# Altium PCB LINE_SENSOR.PcbDoc
Units mm, origin at the board's own origin, x right, y up, seen from the top; angles counter-clockwise.
Board outline 222 x 38.12 mm, 2 copper layers (Top Layer, Bottom Layer); 80 components, 36 nets, 175 pads, 39 vias.
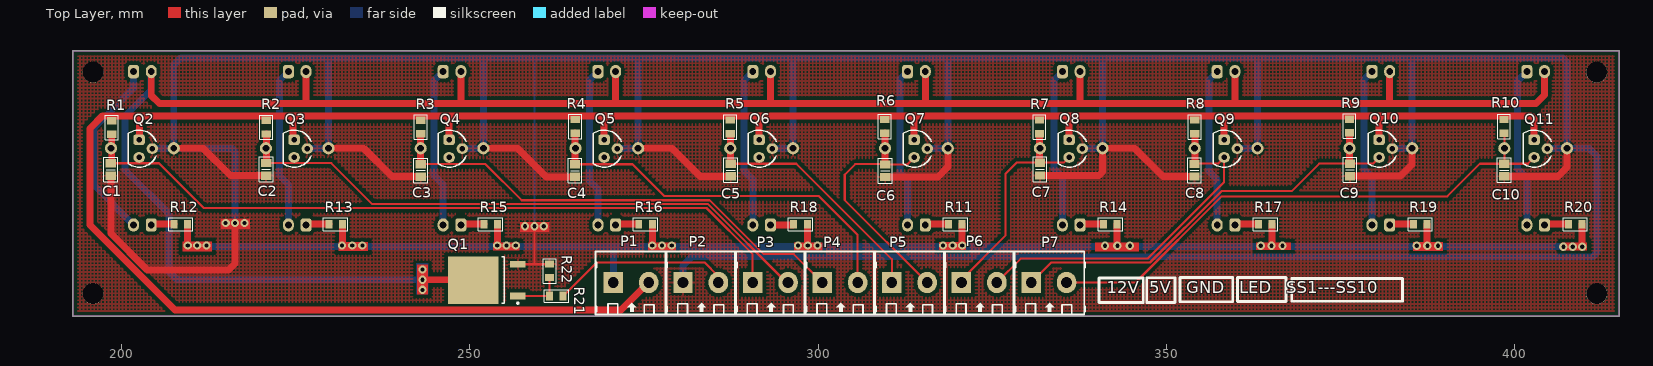
[diagram p0: Top Layer view]
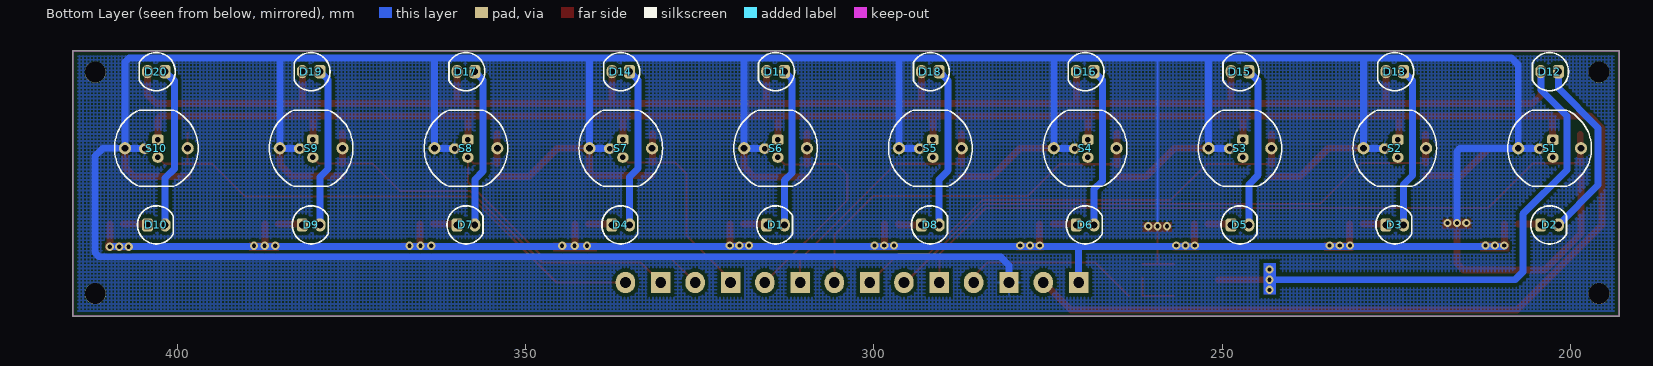
[diagram p1: Bottom Layer view, seen from below]
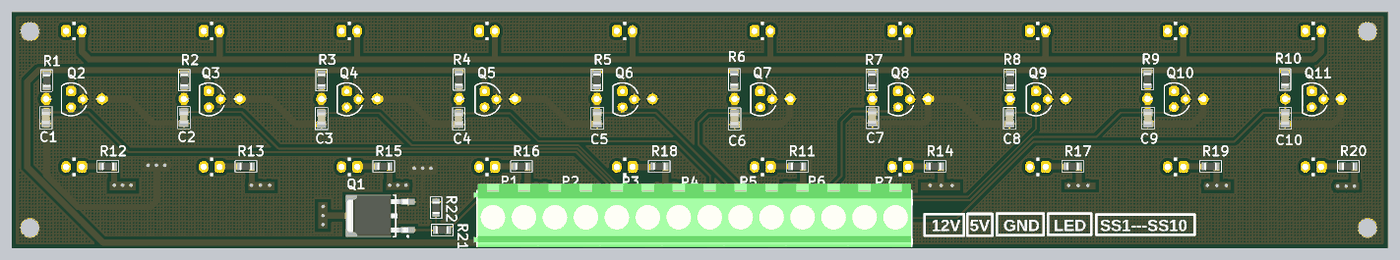
[diagram p2: 3D render of the assembled board from above, using the file's embedded part models]
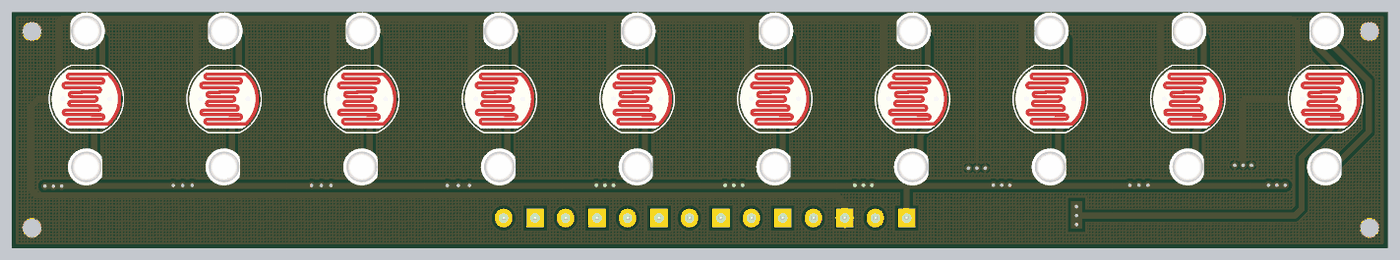
[diagram p3: 3D render of the assembled board from below, using the file's embedded part models]

## Layer stack, top to bottom
Top Solder: solder mask 0.0102, Solder Resist, Dk 3.5
Top Layer: signal copper 0.0356
Dielectric 1: dielectric 0.32, FR-4, Dk 4.8
Bottom Layer: signal copper 0.0356
Bottom Solder: solder mask 0.0102, Solder Resist, Dk 3.5

## Board outline
193,103.875 193,142 415,142 415,103.875

## Design rules (kind name [scope] priority, off if disabled: settings)
Clearance [All] p1: gap=0.254 except(0.508: Arc-Poly Track-Poly SMDPad-Poly THPad-Poly Via-Poly Fill-Poly Poly-Poly Poly-Region Poly-Text)
PolygonConnect [All] p1: connectstyle=Relief reliefconductorwidth=0.254 reliefentries=4 polygonreliefangle="90 Angle" airgapwidth=0.254
RoutingVias [All] p1: holewidth=0.711 width=1.27 viastyle="Through Hole" minholewidth=0.6 minwidth=1.2 maxholewidth=0.711 maxwidth=1.27
SolderMaskExpansion [All] p1: expansion=0.102
Width [All] p1: maxlimit=5 minlimit=0.254 preferedwidth=0.254
30 further rules are at their usual default settings.

## Components (designator, comment, footprint, x,y, rotation, side; value= is the part's Value field where it differs from the comment)
C1 "104" "C 0805" 198.475,124.95 r270 top
C2 "104" "C 0805" 220.75,124.975 r270 top
C3 "104" "C 0805" 242.95,124.825 r270 top
C4 "104" "C 0805" 265.1,124.8 r270 top
C5 "104" "C 0805" 287.45,124.875 r270 top
C6 "104" "C 0805" 309.625,124.775 r270 top
C7 "104" "C 0805" 331.85,125 r270 top
C8 "104" "C 0805" 354.025,124.85 r270 top
C9 "104" "C 0805" 376.35,124.9 r270 top
C10 "104" "C 0805" 398.5,124.875 r270 top
D1 "Led" "LED 5MM - WHITE" 314.111,117 r180 bottom locked
D2 "Led" "LED 5MM - WHITE" 203,117 r180 bottom locked
D3 "Led" "LED 5MM - WHITE" 225.222,117 r180 bottom locked
D4 "Led" "LED 5MM - WHITE" 336.333,117 r180 bottom locked
D5 "Led" "LED 5MM - WHITE" 247.444,117 r180 bottom locked
D6 "Led" "LED 5MM - WHITE" 269.667,117 r180 bottom locked
D7 "Led" "LED 5MM - WHITE" 358.556,117 r180 bottom locked
D8 "Led" "LED 5MM - WHITE" 291.889,117 r180 bottom locked
D9 "Led" "LED 5MM - WHITE" 380.778,117 r180 bottom locked
D10 "Led" "LED 5MM - WHITE" 403,117 r180 bottom locked
D11 "Led" "LED 5MM - WHITE" 314.111,139 r0 bottom locked
D12 "Led" "LED 5MM - WHITE" 203,139 r0 bottom locked
D13 "Led" "LED 5MM - WHITE" 225.222,139 r0 bottom locked
D14 "Led" "LED 5MM - WHITE" 336.333,139 r0 bottom locked
D15 "Led" "LED 5MM - WHITE" 247.444,139 r0 bottom locked
D16 "Led" "LED 5MM - WHITE" 269.667,139 r0 bottom locked
D17 "Led" "LED 5MM - WHITE" 358.556,139 r0 bottom locked
D18 "Led" "LED 5MM - WHITE" 291.889,139 r0 bottom locked
D19 "Led" "LED 5MM - WHITE" 380.778,139 r0 bottom locked
D20 "Led" "LED 5MM - WHITE" 403,139 r0 bottom locked
P1 "Header 2" "HDR Domino 2 - 5MM" 270.6,108.725 r0 top locked
P2 "Header 2" "HDR Domino 2 - 5MM" 280.6,108.725 r0 top locked
P3 "Header 2" "HDR Domino 2 - 5MM" 290.6,108.725 r0 top locked
P4 "Header 2" "HDR Domino 2 - 5MM" 300.594,108.725 r0 top locked
P5 "Header 2" "HDR Domino 2 - 5MM" 310.575,108.725 r0 top locked
P6 "Header 2" "HDR Domino 2 - 5MM" 320.575,108.725 r0 top locked
P7 "Header 2" "HDR Domino 2 - 5MM" 330.575,108.725 r0 top locked
Q1 "MOSFET N-Channel" "TO-252 (DPAK)" 252.45,109.075 r180 top
Q2 "Transistor PNP" TO-92/W100A 202.525,127.95 r270 top
Q3 "Transistor PNP" TO-92/W100A 224.775,127.95 r270 top
Q4 "Transistor PNP" TO-92/W100A 247.025,127.95 r270 top
Q5 "Transistor PNP" TO-92/W100A 269.275,127.95 r270 top
Q6 "Transistor PNP" TO-92/W100A 291.525,127.95 r270 top
Q7 "Transistor PNP" TO-92/W100A 313.775,127.95 r270 top
Q8 "Transistor PNP" TO-92/W100A 336.025,127.95 r270 top
Q9 "Transistor PNP" TO-92/W100A 358.275,127.95 r270 top
Q10 "Transistor PNP" TO-92/W100A 380.525,127.95 r270 top
Q11 "Transistor PNP" TO-92/W100A 402.775,127.95 r270 top
R1 "10k" "R 0805" 198.6,130.975 r90 top
R2 "10k" "R 0805" 220.8,131.025 r90 top
R3 "10k" "R 0805" 242.95,131.05 r90 top
R4 "10k" "R 0805" 265.125,131.15 r90 top
R5 "10k" "R 0805" 287.4,131.075 r90 top
R6 "10k" "R 0805" 309.575,131.15 r90 top
R7 "10k" "R 0805" 331.775,131.075 r90 top
R8 "10k" "R 0805" 354.075,131.075 r90 top
R9 "10k" "R 0805" 376.275,131.2 r90 top
R10 "10k" "R 0805" 398.45,131.15 r90 top
R11 "100" "R 0805 (2012)" 319.708,117.1 r0 top
R12 "100" "R 0805 (2012)" 208.5,117.1 r0 top
R13 "100" "R 0805 (2012)" 230.742,117.1 r0 top
R14 "100" "R 0805 (2012)" 341.95,117.1 r0 top
R15 "100" "R 0805 (2012)" 252.983,117.1 r0 top
R16 "100" "R 0805 (2012)" 275.225,117.1 r0 top
R17 "100" "R 0805 (2012)" 364.192,117.1 r0 top
R18 "100" "R 0805 (2012)" 297.467,117.1 r0 top
R19 "100" "R 0805 (2012)" 386.433,117.1 r0 top
R20 "100" "R 0805 (2012)" 408.675,117.1 r0 top
R21 "4k7" "R 0805 (2012)" 262.425,106.8 r0 top
R22 "100k" "R 0805 (2012)" 261.45,110.4 r270 top
S1 "Photoresistor" PHOTOCELL/12mm 203,128 r180 bottom locked
S2 "Photoresistor" PHOTOCELL/12mm 225.222,128 r180 bottom locked
S3 "Photoresistor" PHOTOCELL/12mm 247.444,128 r180 bottom locked
S4 "Photoresistor" PHOTOCELL/12mm 269.667,128 r180 bottom locked
S5 "Photoresistor" PHOTOCELL/12mm 291.889,128 r180 bottom locked
S6 "Photoresistor" PHOTOCELL/12mm 314.111,128 r180 bottom locked
S7 "Photoresistor" PHOTOCELL/12mm 336.333,128 r180 bottom locked
S8 "Photoresistor" PHOTOCELL/12mm 358.556,128 r180 bottom locked
S9 "Photoresistor" PHOTOCELL/12mm 380.778,128 r180 bottom locked
S10 "Photoresistor" PHOTOCELL/12mm 403,128 r180 bottom locked

## Footprints (in the part's own frame and the unit in brackets; to place one, negate y for a bottom-side part, rotate by r counter-clockwise, add the part's x,y. Pads: shape width x height; smd on the part's side, far side on the other; paste and mask are expansions set on the pad)
"C 0805" [mm] "Chip Capacitor, 2-Leads, Body 2.0x1.3mm, IPC Medium Density"
  rect 1.2x1.5 smd: 1(-0.9,0) 2(0.9,0)
  silkscreen extent -1.78,-1 1.78,1, body extent -1,-0.64 1,0.61, height 0.6
"HDR Domino 2 - 5MM" [mil] "Header 2, 2 pin, hight 400mil, Pin to Pin 200mil, Colour Green"
  rect 110x120 hole 60: 1(0,0)
  oval 110x120 hole 60: 2(200,0)
  silkscreen extent -100,-180 305,175, body extent -121,-186 296,219, height 559
"LED 5MM - WHITE" [mil]
  rrect50% 62x75 hole 39: 1(-50,0)
  oval 62x75 hole 39: 2(50,0)
  silkscreen extent -107,-108 96,108, body extent -118,-118 98,118, height 336
PHOTOCELL/12mm [mm] "Photoresistor"
  round 1.75 hole 1: 1(-4.5,0) 2(4.5,0)
  silkscreen extent -6,-5.46 6,5.46, body extent -5.62,-4.77 5.63,4.78, height 2.93
"R 0805" [mm] "Chip Resistor, 2-Leads, Body 2.0x1.3mm, IPC Medium Density"
  rect 1.05x1.35 smd: 1(-0.975,0) 2(0.975,0)
  silkscreen extent -1.75,-0.92 1.75,0.92, body extent -1,-0.61 1,0.59, height 0.5
"R 0805 (2012)" [mm] "Chip Resistor, 2-Leads, Body 2.0x1.3mm, IPC Medium Density"
  rect 1x1.25 smd: 1(-0.975,0) 2(0.975,0)
  silkscreen extent -1.75,-0.92 1.75,0.92, body extent -1,-0.61 1,0.59, height 0.5
TO-92/W100A [mil]
  rrect50% 60x65 hole 31: 1(-50,0)
  oval 60x65 hole 31: 2(0,75) 3(50,0)
  silkscreen extent -105,-60 105,97
"TO-252 (DPAK)" [mm] "D-PAK, 3-Pads, Body 6.2x6.7mm (max), IPC Medium Density"
  rect 2.25x0.95 smd: 1(-4.45,2.28) 3(-4.45,-2.28)
  rect 7.3x6.8 smd: 2(1.95,0)
  silkscreen extent -4.58,-3.35 -2.1,3.43, body extent -4.54,-3.27 5.4,3.27, height 2.41

## Part data
C1 C2 C3 C4 C5 C6 C7 C8 C9 C10: library part "Capacitor NP", "Capacitor non-pol"
D1 D2 D3 D4 D5 D6 D7 D8 D9 D10 D11 D12 D13 D14 D15 D16 D17 D18 D19 D20: "Typical LED"
P1 P2 P3 P4 P5 P6 P7: "Header, 2-Pin"
Q2 Q3 Q4 Q5 Q6 Q7 Q8 Q9 Q10 Q11: "PNP Bipolar Transistor"
R1 R2 R3 R4 R5 R6 R7 R8 R9 R10 R11 R12 R13 R14 R15 R16 R17 R18 R19 R20 R21 R22: library part Resistor, "Resistor"
S1 S2 S3 S4 S5 S6 S7 S8 S9 S10: "Light dependent resistors"

## Free pads (board coordinates)
  round 3 hole 3: 2(195.9,107.125) 3(195.9,138.925) 4(411.775,138.925) 5(411.775,107.125)

## Via types
v1: diameter 1.2, hole 0.6, Top Layer to Bottom Layer, tented both sides, 39 vias

## Nets (pads, with @x,y where several pads share a name; then routed paths per layer and width w, separated by ;. In a path a pad name is that pad's centre, name@x,y a point inside that pad or via, vN(x,y) a via of type N, cw(c..) or ccw(c..) an arc to the next point about the centre after c; other vN are vias at no path point)
5V: P1.2 Q2.1 Q3.1 Q4.1 Q5.1 Q6.1 Q7.1 Q8.1 Q9.1 Q10.1 Q11.1 R1.2 R2.2 R3.2 R4.2 R5.2 R6.2 R7.2 R8.2 R9.2 R10.2 | length 343.2
  Top Layer w1: Q2.1@202.575,129.245 202.575,132.589 202.5,132.664 ; Q3.1 224.65,129.345 224.65,132.664 ; 225.944,132.619 225.9,132.664 ; Q4.1 247.025,132.639 247,132.664 ; Q5.1 269.275,132.539 269.15,132.664 ; 270.405,132.658 270.4,132.664 ; P1.2 271.711,104.756 207.694,104.756 195.45,117 195.45,130.85 197.264,132.664 202.5,132.664 ; Q6.1 291.525,132.489 291.35,132.664 ; 292.636,132.653 292.625,132.664 ; Q7.1 313.775,132.514 ; Q8.1 336.025,132.638 336.05,132.664 ; Q9.1 358.275,132.614 358.225,132.664 ; Q10.1 380.525,132.639 380.5,132.664 ; Q11.1 402.775,132.25 402.361,132.664 380.5,132.664 ; 202.5,132.664 224.65,132.664 ; 224.65,132.664 225.9,132.664 ; 225.9,132.664 247,132.664 ; 247,132.664 269.15,132.664 ; 269.15,132.664 270.4,132.664 ; 270.4,132.664 291.35,132.664 ; 291.35,132.664 292.625,132.664 ; 292.625,132.664 336.05,132.664 ; 336.05,132.664 358.225,132.664 ; 358.225,132.664 380.5,132.664
12V: P1.1 R11.2 R12.2 R13.2 R14.2 R15.2 R16.2 R17.2 R18.2 R19.2 R20.2 | length 237.2
  Top Layer w1: R12.2 209.475,113.95 v1@209.5,113.925 ; v1@231.65,113.875 231.717,113.942 R13.2 ; v1@253.95,113.925 253.958,113.933 R15.2 ; v1@276.2,113.925 R16.2 ; R18.2 298.442,113.983 v1@298.45,113.975 ; v1@320.675,114.017 v1@320.683,114.025 ; v1@320.683,113.933 R11.2 ; v1@342.925,113.95 R14.2 ; v1@365.1,114 365.167,114.067 R17.2 ; v1@387.4,113.925 387.408,113.933 R19.2 ; R20.2 409.675,117.075 v1@409.675,113.925
  Bottom Layer w1: v1@209.5,113.925 253.95,113.925 270.5,113.925 ; P1.1 270.6,113.825 270.5,113.925 ; v1@409.675,113.925 387.4,113.925 276.2,113.925 270.5,113.925
  other v1: 406.975,113.875 408.325,113.875 409.675,113.875 341.175,114 342.962,114 344.75,114 363.525,114 365.087,114 366.65,114 385.925,114 387.45,114 388.975,114 209.5,114.035 210.85,114.035 212.2,114.035 231.65,114.035 233.112,114.035 234.575,114.035 253.95,114.035 255.275,114.035 256.6,114.035 276.2,114.035 277.587,114.035 278.975,114.035 297.1,114.035 298.5,114.035 299.9,114.035 317.925,114.035 319.3,114.035 320.675,114.035
GND: C1.2 C2.2 C3.2 C4.2 C5.2 C6.2 C7.2 C8.2 C9.2 C10.2 P2.1 pad.2 pad.3 pad.4 pad.5 Q1.3 Q2.2 Q3.2 Q4.2 Q5.2 Q6.2 Q7.2 Q8.2 Q9.2 Q10.2 Q11.2 R22.1 S1.1 S2.1 S3.1 S4.1 S5.1 S6.1 S7.1 S8.1 S9.1 S10.1 | length 723.2
  Top Layer w0.3: Q1.3 259.275,111.355 ; v1(259.275,116.8) 259.275,111.355 ; R22.1 261.43,111.355 259.275,111.355
  Top Layer w1: C1.2 198.475,115.748 203.698,110.525 215.35,110.525 216.3,111.475 v1(216.3,117.275) ; S1.1 211.725,128 215.65,124.075 C2.2 ; v1@214.925,117.19 v1@214.95,117.165 ; S2.1 234.775,128 238.85,123.925 C3.2 ; S3.1 256.875,128 260.975,123.9 C4.2 ; v1@257.9,116.715 v1@257.925,116.69 ; S4.1 279.05,128 283.075,123.975 C5.2 ; C6.2 317.2,123.875 318.611,125.286 S6.1 ; C7.2 340.325,124.1 340.833,124.608 S7.1 345.425,128 349.475,123.95 C8.2 ; C9.2 383.625,124 385.278,125.653 S9.1 ; C10.2 406.2,123.975 407.5,125.275 S10.1
  Bottom Layer w0.3: v1(259.275,116.8) 259.275,140.9 259.325,140.95
  Bottom Layer w1: Q2.2 S1.1@207.45,127.95 ; v1(216.3,117.275) 216.3,127.55 215.9,127.95 S1.1@207.45,127.95 ; Q3.2 229.672,127.95 S2.1 229.722,140.928 229.7,140.95 ; Q4.2 251.894,127.95 S3.1 251.944,140.856 251.85,140.95 ; Q5.2 274.117,127.95 S4.1 274.167,140.867 274.25,140.95 ; P2.1 280.6,111.2 281.825,112.425 411.2,112.425 411.8,113.025 411.8,126.875 410.675,128 S10.1 ; Q6.2 296.339,127.95 S5.1 296.389,140.939 296.4,140.95 ; Q7.2 318.561,127.95 S6.1 318.611,140.711 318.85,140.95 ; Q8.2 340.783,127.95 S7.1 340.833,140.908 340.875,140.95 ; Q9.2 363.006,127.95 S8.1 363.056,140.844 362.95,140.95 ; Q10.2 385.228,127.95 S9.1 385.278,140.878 385.35,140.95 ; Q11.2 407.45,127.95 S10.1 ; S1.1@207.45,127.95 S1.1 207.5,139.975 208.475,140.95 229.7,140.95 ; 229.7,140.95 251.85,140.95 ; 251.85,140.95 259.325,140.95 274.25,140.95 ; 274.25,140.95 296.4,140.95 ; 296.4,140.95 318.85,140.95 ; 318.85,140.95 340.875,140.95 ; 340.875,140.95 362.95,140.95 ; 362.95,140.95 385.35,140.95 ; 385.35,140.95 406.925,140.95 407.5,140.375 S10.1
  other v1: 257.925,116.8 260.625,116.8 214.95,117.275 217.65,117.275
"LED PWM": P2.2 R21.2 | length 26
  Top Layer w0.3: R21.2 268.2,111.6 283.725,111.6 285.68,109.645 P2.2
NetD1_1: D1.1 R11.1 | length 3.4
  Top Layer w1: D1.1 315.481,117.1 R11.1
NetD1_2: D1.2 D11.1 | length 22.9
  Bottom Layer w1: D1.2 312.841,123.409 311.775,124.475 311.775,137.934 D11.1
NetD2_1: D2.1 R12.1 | length 3.3
  Top Layer w1: D2.1 204.37,117.1 R12.1
NetD2_2: D2.2 D12.1 | length 26.7
  Bottom Layer w1: D2.2 196.025,122.705 196.025,130.925 201.73,136.63 D12.1
NetD3_1: D3.1 R13.1 | length 3.3
  Top Layer w1: D3.1 226.592,117.1 R13.1
NetD3_2: D3.2 D13.1 | length 23.1
  Bottom Layer w1: D3.2 223.952,122.798 222.65,124.1 222.65,137.698 D13.1
NetD4_1: D4.1 R14.1 | length 3.4
  Top Layer w1: D4.1 337.703,117.1 R14.1
NetD4_2: D4.2 D14.1 | length 23
  Bottom Layer w1: D4.2 335.063,123.862 333.85,125.075 333.85,137.787 D14.1
NetD5_1: D5.1 R15.1 | length 3.3
  Top Layer w1: D5.1 248.814,117.1 R15.1
NetD5_2: D5.2 D15.1 | length 23.1
  Bottom Layer w1: D5.2 246.174,122.801 244.825,124.15 244.825,137.651 D15.1
NetD6_1: D6.1 R16.1 | length 3.4
  Top Layer w1: D6.1 271.037,117.1 R16.1
NetD6_2: D6.2 D16.1 | length 23
  Bottom Layer w1: D6.2 268.397,122.128 267.2,123.325 267.2,137.803 D16.1
NetD7_1: D7.1 R17.1 | length 3.4
  Top Layer w1: D7.1 359.926,117.1 R17.1
NetD7_2: D7.2 D17.1 | length 23
  Bottom Layer w1: D7.2 357.286,123.514 356.1,124.7 356.1,137.814 D17.1
NetD8_1: D8.1 R18.1 | length 3.4
  Top Layer w1: D8.1 296.392,117 R18.1
NetD8_2: D8.2 D18.1 | length 23
  Bottom Layer w1: D8.2 290.619,123.531 289.375,124.775 289.375,137.756 D18.1
NetD9_1: D9.1 R19.1 | length 3.5
  Top Layer w1: D9.1 382.148,117.1 R19.1
NetD9_2: D9.2 D19.1 | length 22.9
  Bottom Layer w1: D9.2 379.508,123.892 378.375,125.025 378.375,137.867 D19.1
NetD10_1: D10.1 R20.1 | length 3.5
  Top Layer w1: D10.1 404.37,117.1 R20.1
NetD10_2: D10.2 D20.1 | length 23.1
  Bottom Layer w1: D10.2 401.73,123.745 400.425,125.05 400.425,137.695 D20.1
NetD11_2: D11.2 D12.2 D13.2 D14.2 D15.2 D16.2 D17.2 D18.2 D19.2 D20.2 Q1.2 | length 321.7
  Top Layer w1: D12.2 204.27,135.605 205.45,134.425 226.575,134.425 ; D13.2 226.492,134.508 226.575,134.425 ; v1(243.2,109.125) 250.45,109.125 Q1.2 ; D15.2 248.714,134.614 248.525,134.425 ; D16.2 270.937,134.487 270.875,134.425 ; D18.2 293.159,134.534 293.05,134.425 ; D11.2 315.381,134.506 315.3,134.425 ; D14.2 337.603,134.472 337.65,134.425 ; D17.2 359.826,134.476 359.775,134.425 ; D19.2 382.048,134.477 382.1,134.425 ; D20.2 404.27,135.62 403.075,134.425 382.1,134.425 ; 226.575,134.425 248.525,134.425 ; 248.525,134.425 270.875,134.425 ; 270.875,134.425 293.05,134.425 ; 293.05,134.425 315.3,134.425 ; 315.3,134.425 337.65,134.425 ; 337.65,134.425 359.775,134.425 ; 359.775,134.425 382.1,134.425
  Bottom Layer w1: D12.2 204.25,138.98 204.25,136.35 200.525,132.625 200.525,124.875 206.85,118.55 206.85,110.25 207.975,109.125 v1(243.2,109.125)
  other v1: 243.2,107.675 243.2,110.6
NetQ1_1: Q1.1 R21.1 R22.2 | length 7.2
  Top Layer w0.3: Q1.1 261.445,106.795 R21.1 R22.2
SS1: C1.1 P3.1 Q2.3 R1.1 S1.2 | length 106.6
  Top Layer w0.3: C1.1 205.375,125.85 211.8,119.425 283.975,119.425 290.6,112.8 P3.1 ; Q2.3 202.525,125.95 202.575,125.9 ; Q2.3@202.575,126.68 Q2.3@202.575,126.705
  Top Layer w1: C1.1 198.6,125.975 R1.1
SS2: C2.1 P3.2 Q3.3 R2.1 S2.2 | length 87.2
  Top Layer w0.3: C2.1 224.9,125.875 ; Q3.3 224.775,126 224.9,125.875 ; P3.2 295.458,108.725 284.204,119.979 236.021,119.979 230.125,125.875 224.9,125.875
  Top Layer w1: S2.2 S2.2@220.8,128 ; C2.1 220.8,125.925 S2.2@220.8,128 ; R2.1 S2.2@220.8,128
SS3: C3.1 P4.1 Q4.3 R3.1 S3.2 | length 70
  Top Layer w0.3: C3.1 247.05,125.725 ; Q4.3 247.025,125.75 247.05,125.725 ; P4.1 296.519,112.8 292.167,112.8 284.434,120.533 257.45,120.533 252.258,125.725 247.05,125.725
  Top Layer w1: C3.1 R3.1
SS4: C4.1 P4.2 Q5.3 R4.1 S4.2 | length 57.1
  Top Layer w0.3: C4.1 269.325,125.7 ; Q5.3 269.275,125.75 269.325,125.7 ; P4.2 305.674,115.551 300.075,121.15 277.9,121.15 273.35,125.7 269.325,125.7
  Top Layer w1: C4.1 265.125,125.725 R4.1
SS5: C5.1 P5.1 Q6.3 R5.1 S5.2 | length 37.4
  Top Layer w0.3: C5.1 291.575,125.775 ; Q6.3 291.525,125.825 291.575,125.775 ; P5.1 310.575,112.075 296.875,125.775 291.575,125.775
  Top Layer w1: S5.2 S5.2@287.4,128 ; R5.1 S5.2@287.4,128 ; C5.1 287.4,125.825 S5.2@287.4,128
SS6: C6.1 P5.2 Q7.3 R6.1 S6.2 | length 35.8
  Top Layer w0.3: C6.1@309.575,125.725 305.325,125.725 303.825,124.225 303.825,120.555 P5.2 ; C6.1 312.77,125.675 Q7.3
  Top Layer w1: C6.1@309.575,125.725 R6.1
SS7: C7.1 P6.1 Q8.3 R7.1 S7.2 | length 32.4
  Top Layer w0.3: P6.1 320.575,109.15 326.875,115.45 326.875,124.3 328.55,125.975 331.775,125.975 335.32,125.975 Q8.3
  Top Layer w1: C7.1@331.775,125.975 R7.1
SS8: C8.1 P6.2 Q9.3 R8.1 S8.2 | length 51
  Top Layer w0.3: P6.2 329.08,112.15 347.275,112.15 358.275,123.15 Q9.3 357.395,125.8 C8.1@354.075,125.8
  Top Layer w1: S8.2 S8.2@354.075,128 ; C8.1@354.075,125.8 S8.2@354.075,128 ; R8.1 S8.2@354.075,128
SS9: C9.1 P7.1 Q10.3 R9.1 S9.2 | length 61.8
  Top Layer w0.3: P7.1 333.446,111.596 347.646,111.596 357.9,121.85 367.975,121.85 371.925,125.8 C9.1 379.645,125.8 Q10.3
  Top Layer w1: R9.1 376.275,125.875 C9.1
SS10: C10.1 P7.2 Q11.3 R10.1 S10.2 | length 79
  Top Layer w0.3: P7.2 345.558,108.725 357.933,121.1 390.325,121.1 395,125.775 C10.1 ; R10.1 398.5,130.125 C10.1 ; Q11.3 401.87,125.775 C10.1

## Polygon pours and split planes (outlines as drawn)
GND on Top Layer "GND_L01_P004" (hatched 90Degree grid 0.508 track 0.254, remove dead copper, pour order 4): 193,142 193,103.875 415,103.875 415,142
GND on Bottom Layer "GND_L02_P006" (hatched 90Degree grid 0.508 track 0.254, remove dead copper, pour order 6): 193,142 415,142 415,103.875 193,103.875

## Keep-outs
Keep-Out Layer:
  lines w0.254: 193,103.875 415,103.875 415,142 413,142 193,142 193,103.875

## Other copper
Top Layer:
  rectangle net GND: 257.2,115.965 261.425,117.415
  rectangle net GND: 214.225,116.44 218.45,117.89
  rectangle net 12V: 208.775,113.2 213,114.65
  rectangle net 12V: 231.125,113.225 235.4,114.525
  rectangle net 12V: 253.35,113.325 257.125,114.45
  rectangle net 12V: 275.575,113.325 279.625,114.45
  rectangle net 12V: 296.55,113.35 300.6,114.5
  rectangle net 12V: 317.35,113.375 321.25,114.525
  rectangle net 12V: 339.725,113.2 346.025,114.5
  rectangle net 12V: 362.85,113.375 367.9,114.45
  rectangle net 12V: 385.425,113.275 389.725,114.55
  rectangle net 12V: 406.7,113.3 410.4,114.45
  rectangle net NetD11_2: 242.4,107 243.975,111.3
Bottom Layer:
  rectangle net NetD11_2: 242.275,107 244.1,111.5

## Silkscreen, mask and mechanical layers (free items; w line width, h text height)
Top Overlay:
  lines w0.4: 340.3,105.875 346.656,105.875 346.656,109.375 340.3,109.375 340.3,105.875 ; 347.164,105.875 351.225,105.875 351.225,109.4 347.164,109.4 347.164,105.875 ; 351.925,105.975 359.525,105.975 359.525,109.45 351.925,109.45 351.925,105.975 ; 360.2,106 367.175,106 367.175,109.45 360.2,109.45 360.2,106 ; 368,106.025 383.875,106.025 383.875,109.3 368,109.3 368,106.025
  text "12V  5V   GND   LED   SS1---SS10" at 341.4,106.625 h3